# Altium PCB PicoROM IMPORTED.PcbDoc
Units mm, origin at the board's own origin, x right, y up, seen from the top; angles counter-clockwise.
Board outline 42.2 x 17.8 mm, 6 copper layers (F.Cu, In1.Cu, In2.Cu, In3.Cu, In4.Cu, B.Cu); 56 components, 106 nets, 388 pads, 131 vias.
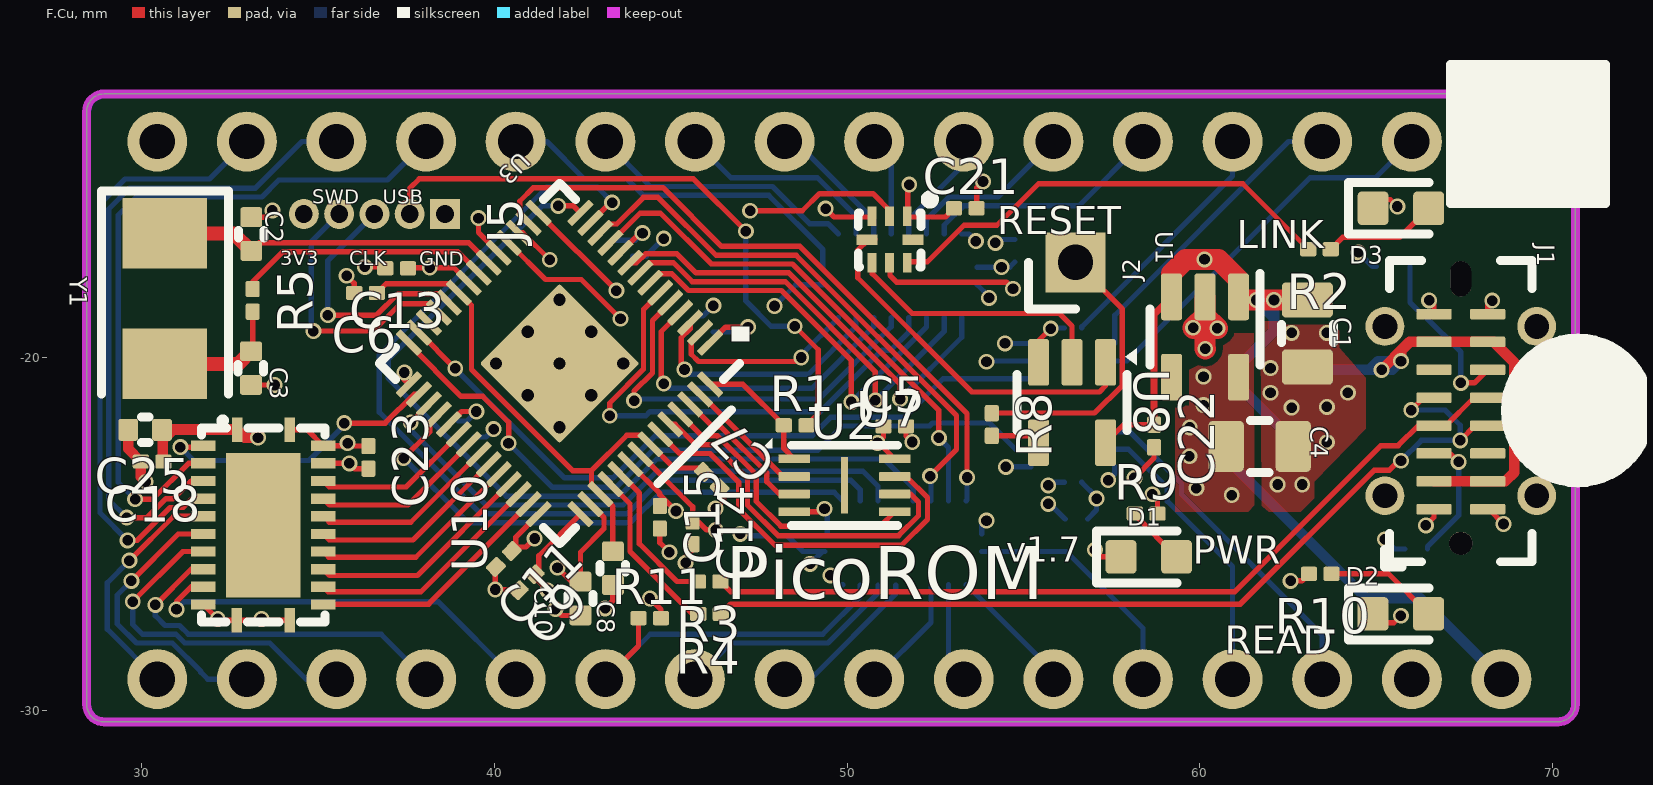
[diagram p0: F.Cu view]
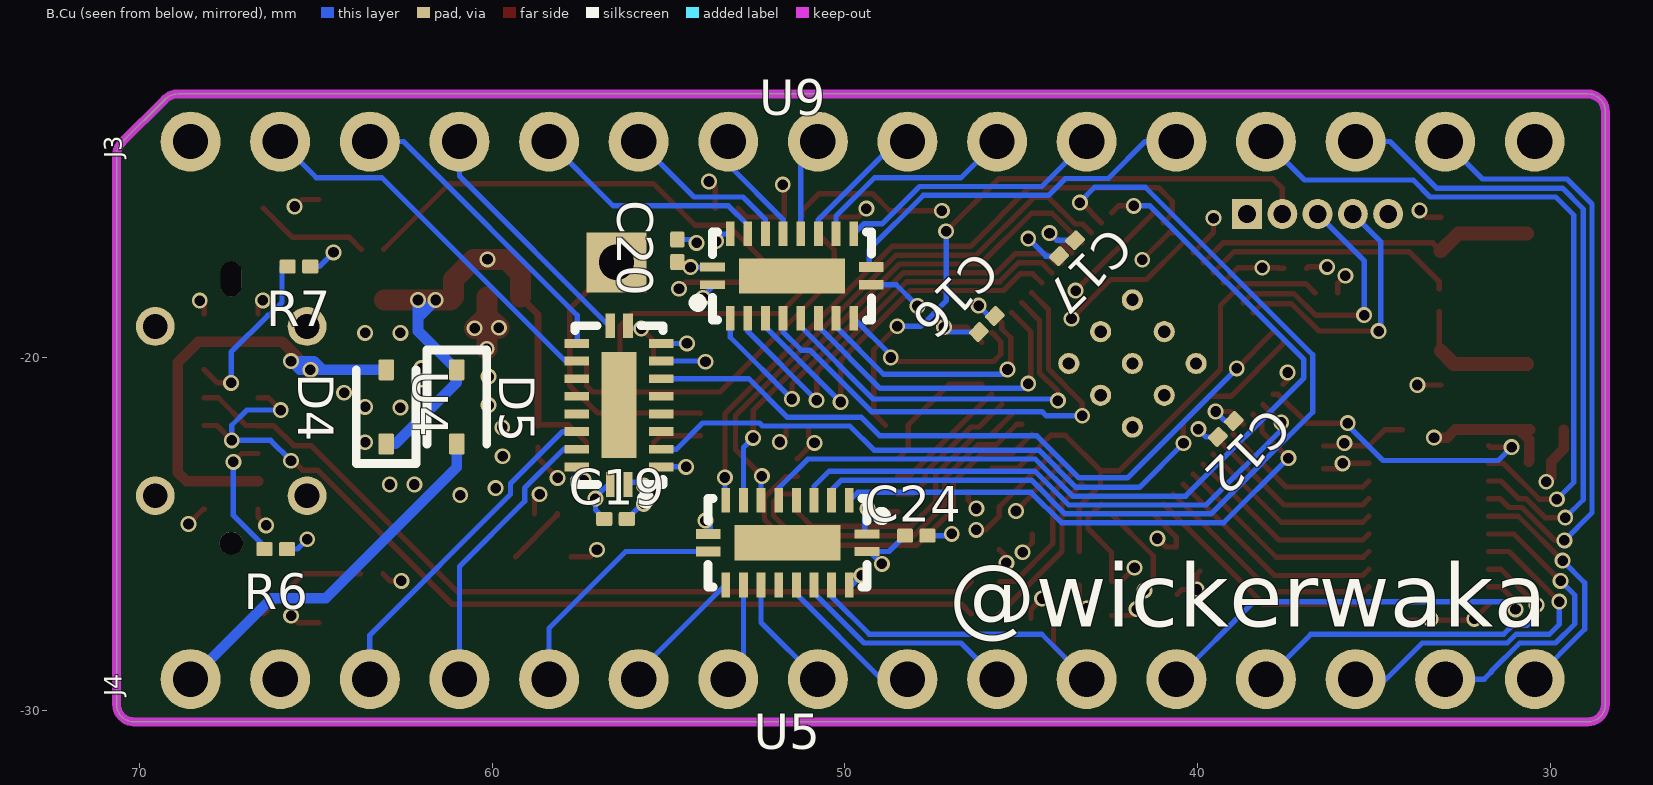
[diagram p1: B.Cu view, seen from below]
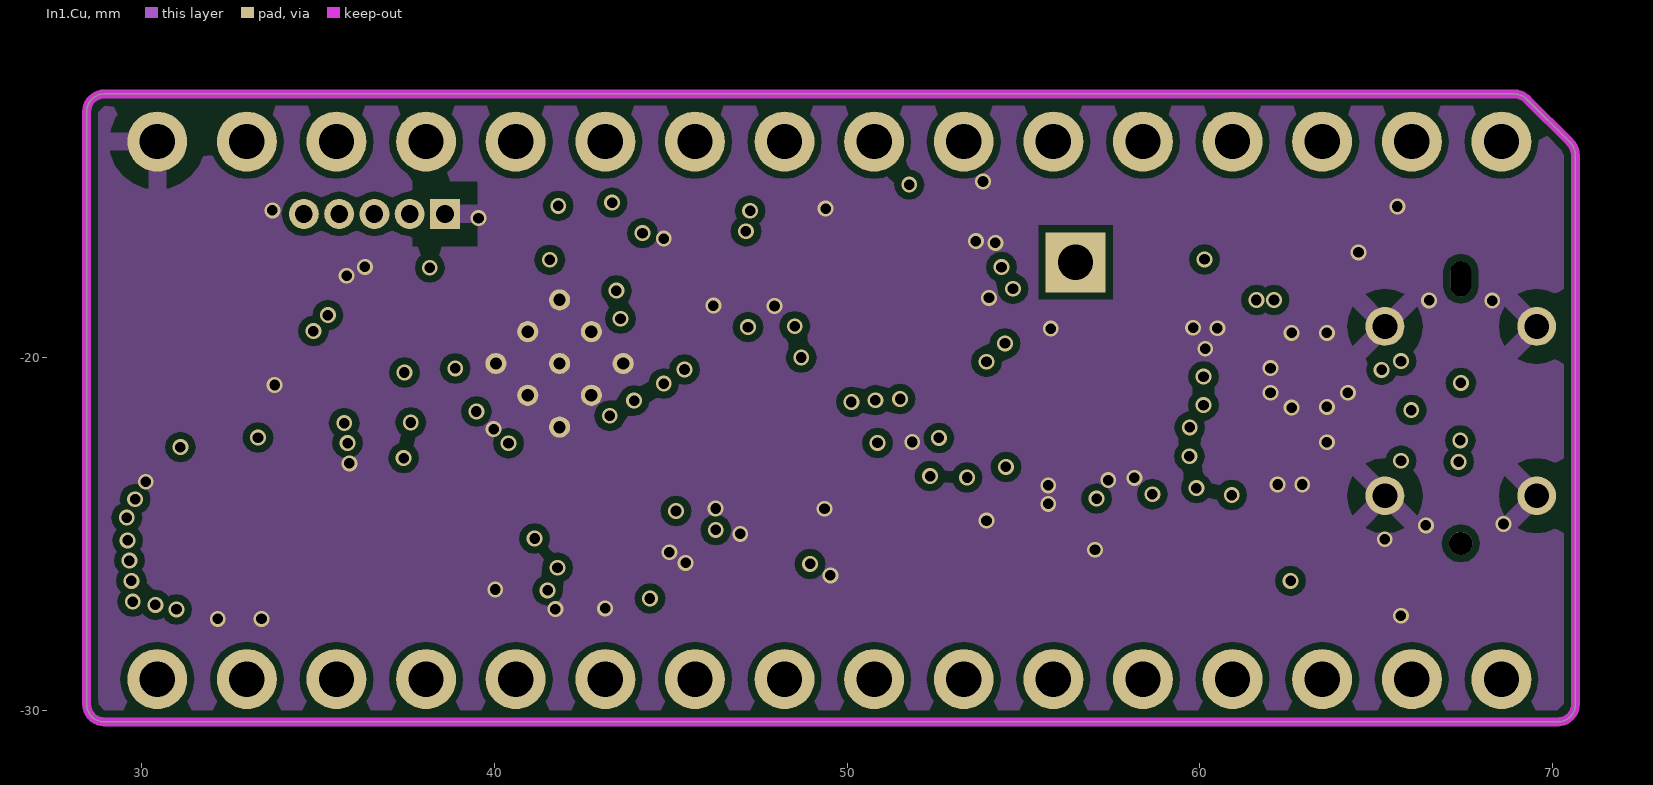
[diagram p2: In1.Cu]
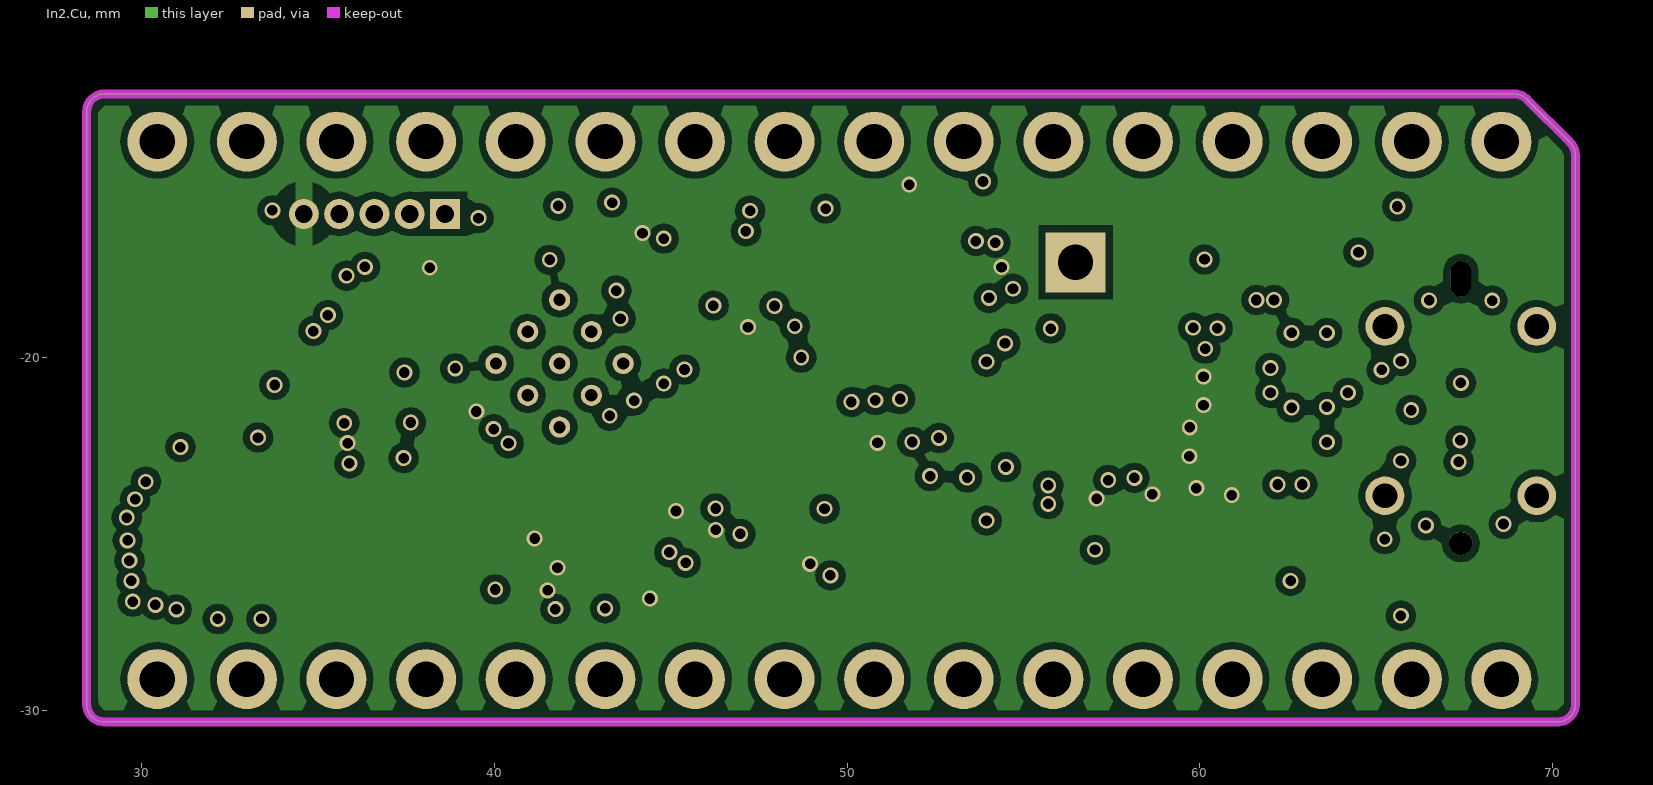
[diagram p3: In2.Cu]
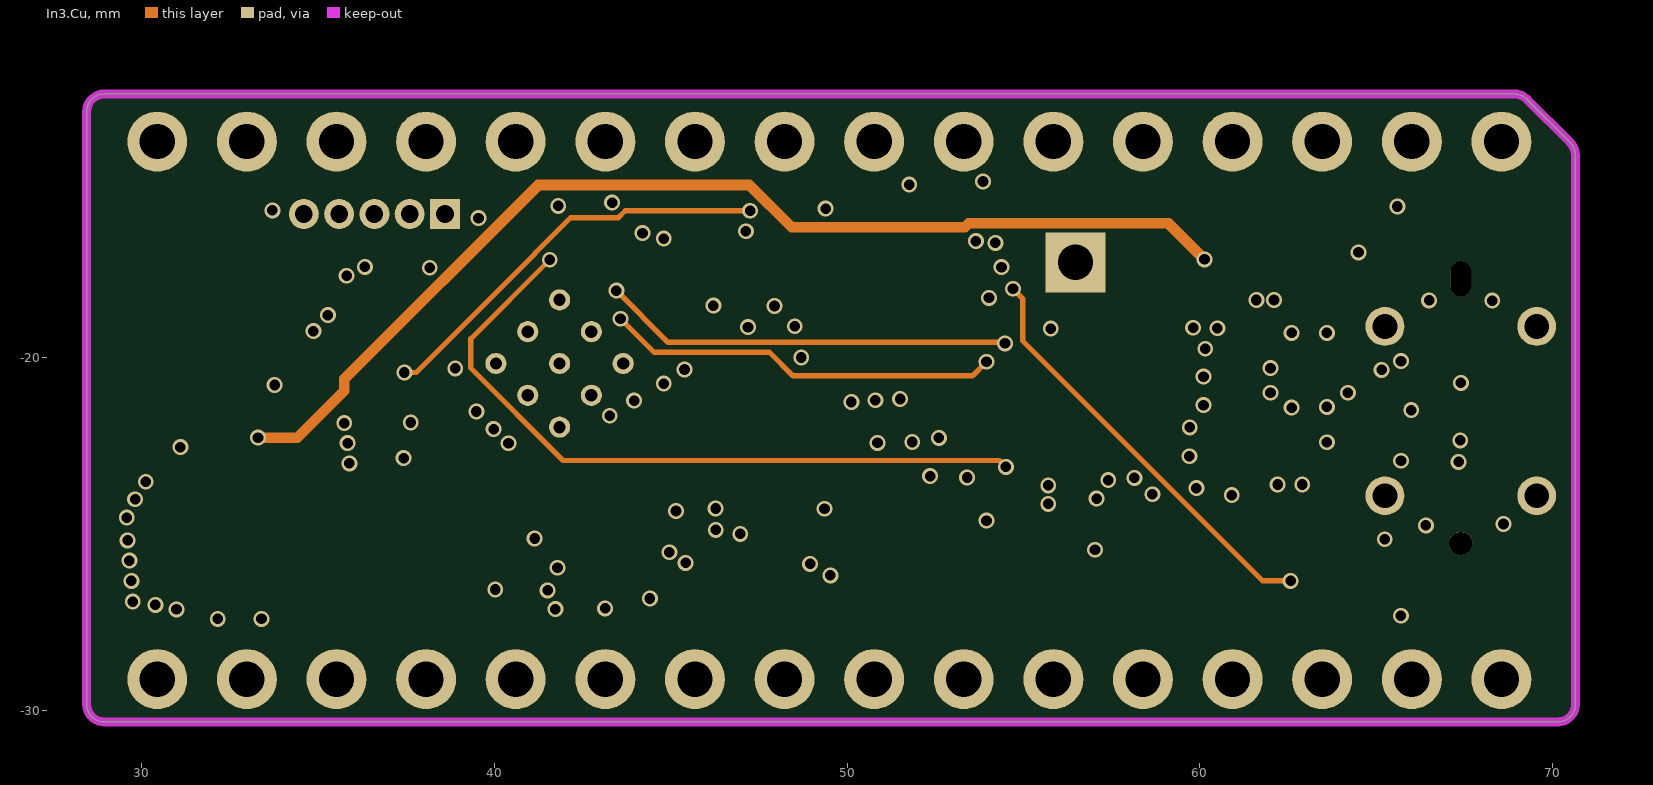
[diagram p4: In3.Cu]
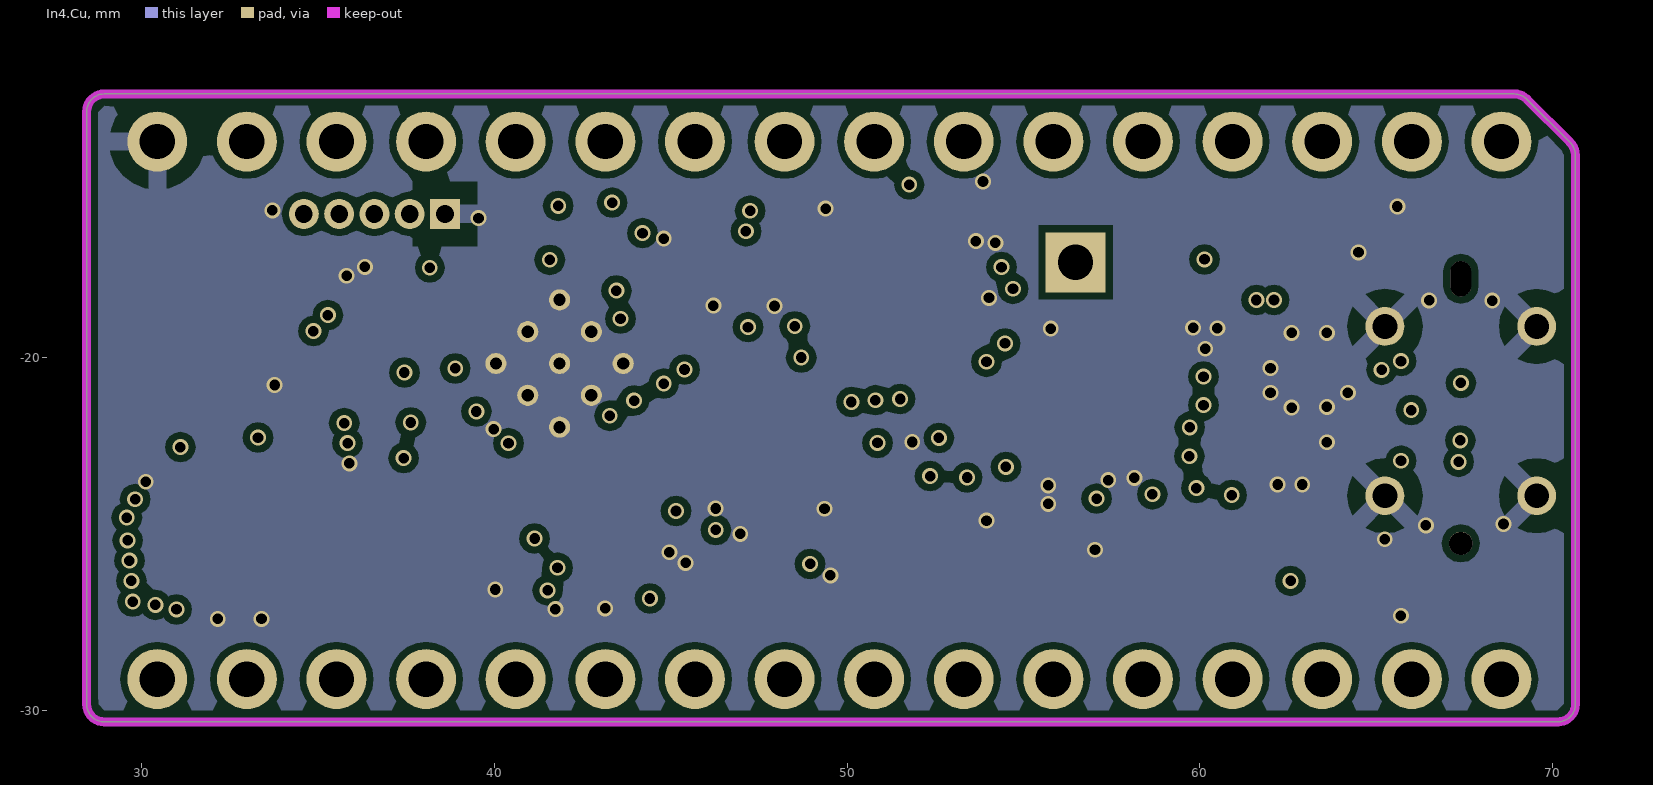
[diagram p5: In4.Cu]

## Layer stack, top to bottom
F.Mask: solder mask 0.0102, Solder Resist, Dk 3.5
F.Cu: signal copper 0.0356
Dielectric 1: dielectric 0.32, FR-4, Dk 4.8
In1.Cu: signal copper 0.0356
Dielectric2: dielectric 0.32, FR-4, Dk 4.8
In2.Cu: signal copper 0.0356
Dielectric3: dielectric 0.32, FR-4, Dk 4.8
In3.Cu: signal copper 0.0356
Dielectric4: dielectric 0.32, FR-4, Dk 4.8
In4.Cu: signal copper 0.0356
Dielectric5: dielectric 0.32, FR-4, Dk 4.8
B.Cu: signal copper 0.0356
B.Mask: solder mask 0.0102, Solder Resist, Dk 3.5

## Board outline
28.945,-12.529 68.913,-12.53 cw(c68.913,-13.03) 69.266,-12.676 70.494,-13.904 cw(c70.14,-14.257) 70.645,-29.829 cw(c70.145,-29.829) 70.145,-30.329 28.945,-30.329 cw(c28.945,-29.829) 28.445,-29.829 28.445,-13.029 cw(c28.945,-13.029) 28.945,-12.529

## Design rules (kind name [scope] priority, off if disabled: settings)
Clearance "Clearence 0.2_Polygon" [InNamedPolygon('F.Cu-GND') OR InNamedPolygon('F.Cu-+3V3') OR InNamedPolygon('In1.Cu-GND') OR InNamedPolygon('In4.Cu-GND') OR InNamedPolygon('In2.Cu-+3V3')] p1: gap=0.2 ignorepadtopadclearanceinfootprint=FALSE
MinimumSolderMaskSliver [All] p1: minsoldermaskwidth=0
PolygonConnect Polygon_In2.Cu-+3V3_ConnectDirect [IsNamedPolygon('In2.Cu-+3V3') vs IsVia] p1: connectstyle=Direct reliefconductorwidth=0.254 reliefentries=4 polygonreliefangle="90 Angle" airgapwidth=0.254
PolygonConnect Polygon_In2.Cu-+3V3_ConnectRelief45 [IsNamedPolygon('In2.Cu-+3V3') vs (IsThruPin or IsSMTPin) and (PadShape_AllLayers = 'Round')] p2: connectstyle=Relief reliefconductorwidth=0.5 reliefentries=4 polygonreliefangle="45 Angle" airgapwidth=0.5
PolygonConnect Polygon_In2.Cu-+3V3_ConnectRelief90 [IsNamedPolygon('In2.Cu-+3V3') vs (IsThruPin or IsSMTPin) and (PadShape_AllLayers <> 'Round')] p3: connectstyle=Relief reliefconductorwidth=0.5 reliefentries=4 polygonreliefangle="90 Angle" airgapwidth=0.5
PolygonConnect Polygon_In4.Cu-GND_ConnectDirect [IsNamedPolygon('In4.Cu-GND') vs IsVia] p4: connectstyle=Direct reliefconductorwidth=0.254 reliefentries=4 polygonreliefangle="90 Angle" airgapwidth=0.254
PolygonConnect Polygon_In4.Cu-GND_ConnectRelief45 [IsNamedPolygon('In4.Cu-GND') vs (IsThruPin or IsSMTPin) and (PadShape_AllLayers = 'Round')] p5: connectstyle=Relief reliefconductorwidth=0.508 reliefentries=4 polygonreliefangle="45 Angle" airgapwidth=0.508
PolygonConnect Polygon_In4.Cu-GND_ConnectRelief90 [IsNamedPolygon('In4.Cu-GND') vs (IsThruPin or IsSMTPin) and (PadShape_AllLayers <> 'Round')] p6: connectstyle=Relief reliefconductorwidth=0.508 reliefentries=4 polygonreliefangle="90 Angle" airgapwidth=0.508
PolygonConnect Polygon_In1.Cu-GND_ConnectDirect [IsNamedPolygon('In1.Cu-GND') vs IsVia] p7: connectstyle=Direct reliefconductorwidth=0.254 reliefentries=4 polygonreliefangle="90 Angle" airgapwidth=0.254
PolygonConnect Polygon_In1.Cu-GND_ConnectRelief45 [IsNamedPolygon('In1.Cu-GND') vs (IsThruPin or IsSMTPin) and (PadShape_AllLayers = 'Round')] p8: connectstyle=Relief reliefconductorwidth=0.508 reliefentries=4 polygonreliefangle="45 Angle" airgapwidth=0.508
PolygonConnect Polygon_In1.Cu-GND_ConnectRelief90 [IsNamedPolygon('In1.Cu-GND') vs (IsThruPin or IsSMTPin) and (PadShape_AllLayers <> 'Round')] p9: connectstyle=Relief reliefconductorwidth=0.508 reliefentries=4 polygonreliefangle="90 Angle" airgapwidth=0.508
PolygonConnect Polygon_F.Cu-+3V3_ConnectDirect [IsNamedPolygon('F.Cu-+3V3')] p10: connectstyle=Direct reliefconductorwidth=0.254 reliefentries=4 polygonreliefangle="90 Angle" airgapwidth=0.254
PolygonConnect Polygon_F.Cu-GND_ConnectDirect [IsNamedPolygon('F.Cu-GND')] p11: connectstyle=Direct reliefconductorwidth=0.254 reliefentries=4 polygonreliefangle="90 Angle" airgapwidth=0.254
RoutingVias [All] p1: holewidth=0.711 width=1.27 viastyle="Through Hole" minholewidth=0.711 minwidth=1.27 maxholewidth=0.711 maxwidth=1.27
SilkToSilkClearance [All] p1: silktosilkclearance=0
SilkToSolderMaskClearance [IsPad] p1: minsilkscreentomaskgap=0 clearancetoexposedcopper=TRUE
SolderMaskExpansion [All] p1: expansion=0.102 istentingtop=FALSE
Width [All] p1: maxlimit=10 minlimit=0.254 preferedwidth=0.254 midlayer1_maxwidth=0.254 midlayer4_maxwidth=0.254 minimp=50.000000 maximp=50.000000 favimp=50.000000
27 further rules are at their usual default settings.

## Components (designator, comment, footprint, x,y, rotation, side; value= is the part's Value field where it differs from the comment)
C1 "Comment" C_0805_2012Metric 63.045,-19.319 r270 top value=1u
C2 "Comment" C_0402_1005Metric 33.11,-16.5 r90 top value=27p
C3 "Comment" C_0402_1005Metric 33.1,-20.3 r270 top value=27p
C4 "Comment" C_0805_2012Metric 61.695,-22.519 r0 top value=1u
C5 "Comment" C_0201_0603Metric#1 51.35,-21.95 r0 top value=100n
C6 "Comment" C_0201_0603Metric#1 36.35,-18.17 r180 top value=100n
C7 "Comment" C_0201_0603Metric#1 46.16,-23.47 r315 top value=100n
C8 "Comment" C_0402_1005Metric 43.36,-25.97 r270 top value=1u
C9 "Comment" C_0201_0603Metric#1 40.92,-26.37 r225 top value=100n
C10 "Comment" C_0402_1005Metric 42.44,-26.83 r270 top value=1u
C11 "Comment" C_0201_0603Metric#1 40.27,-25.71 r225 top value=100n
C12 "Comment" C_0201_0603Metric#2 39.2,-22.025 r135 bottom value=100n
C13 "Comment" C_0201_0603Metric#1 37.23,-17.47 r180 top value=100n
C14 "Comment" C_0201_0603Metric#1 45.62,-24.97 r270 top value=100n
C15 "Comment" C_0201_0603Metric#1 44.69,-24.53 r270 top value=100n
C16 "Comment" C_0201_0603Metric#2 45.975,-19.05 r315 bottom value=100n
C17 "Comment" C_0201_0603Metric#2 43.7,-16.9 r135 bottom value=100n
C18 "Comment" C_0201_0603Metric#1 30.3,-22.95 r180 top value=100n
C19 "Comment" C_0201_0603Metric#2 56.5,-24.575 r0 bottom value=100n
C20 "Comment" C_0201_0603Metric#2 54.75,-16.975 r270 bottom value=100n
C21 "Comment" C_0201_0603Metric#1 53.35,-15.77 r0 top value=100n
C22 "Comment" C_0201_0603Metric#1 58.7,-22.225 r270 top value=100n
C23 "Comment" C_0201_0603Metric#1 36.43,-22.83 r270 top value=100n
C24 "Comment" C_0201_0603Metric#2 47.975,-25.05 r0 bottom value=100n
C25 "Comment" C_0402_1005Metric 30.1,-22.05 r180 top value=1u
D1 "Comment" LED_0603_1608Metric 58.55,-25.65 r0 top value=LED
D2 "Comment" LED_0603_1608Metric 65.695,-27.269 r0 top value=LED
D3 "Comment" LED_0603_1608Metric 65.695,-15.769 r0 top value=LED
D4 "Comment" D_SOD-323 63,-21.4 r270 bottom value=NSR0320MW2T1G
D5 "Comment" D_SOD-323 61,-21.4 r90 bottom value=NSR0320MW2T1G
J1 "Comment" USB_C_Receptacle_G-Switch_GT-USB-7051x 67.395,-21.519 r90 top value=USB_C_Receptacle_USB2.0
J2 "Comment" PinHeader_1x01_P2.54mm_Vertical 56.475,-17.3 r90 top value="External Reset"
J3 "Comment" PinHeader_1x16_P2.54mm_Vertical 68.545,-13.879 r270 bottom value=Conn_01x16
J4 "Comment" PinHeader_1x16_P2.54mm_Vertical 68.545,-29.119 r270 bottom value=Conn_01x16
J5 "Comment" PinHeader_1x05_P1.00mm_Vertical 38.6,-15.93 r270 top value=Conn_01x05_Pin
R1 "Comment" R_0201_0603Metric#1 48.525,-21.921 r0 top value=1k
R2 "Comment" R_0201_0603Metric#1 63.39,-16.93 r180 top value=1k
R3 "Comment" R_0201_0603Metric#1 46.09,-26.35 r180 top value=27
R4 "Comment" R_0201_0603Metric#1 46.1,-27.27 r180 top value=27
R5 "Comment" R_0201_0603Metric#1 33.15,-18.38 r270 top value=1k
R6 "Comment" R_0201_0603Metric#2 66.13,-25.43 r180 bottom value=5.1k
R7 "Comment" R_0201_0603Metric#2 65.475,-17.419 r180 bottom value=5.1k
R8 "Comment" R_0201_0603Metric#1 54.1,-21.9 r270 top value=1k
R9 "Comment" R_0201_0603Metric#1 58.475,-24.425 r0 top value=1k
R10 "Comment" R_0201_0603Metric#1 63.41,-26.13 r180 top value=1k
R11 "Comment" R_0201_0603Metric#1 44.405,-27.39 r0 top value=100k
U1 "Comment" SOT-23-5 60.145,-19.419 r270 top value=AP2112K-3.3
U2 "Comment" Winbond_USON-8-1EP_3x2mm_P0.5mm_EP0.2x1.6mm 49.925,-23.621 r0 top value=W25Q16JVUXIQ
U3 "Comment" RP2040-QFN-56 41.848,-20.169 r225 top value=RP2040
U4 "Comment" V-QFN4525-20_L4.5-W2.5-P0.50-BL 56.4,-21.35 r270 bottom value=74LVCH245
U5 "Comment" V-QFN4525-20_L4.5-W2.5-P0.50-BL 51.625,-25.25 r180 bottom value=74LVCH245
U7 "Comment" X2QFN-8_L1.5-W1.5-P0.50-BL 51.215,-16.65 r180 top value=TCA5405RUGR
U8 "Comment" SOT-23-5 56.375,-21.275 r270 top value=74AHCT1G126
U9 "Comment" V-QFN4525-20_L4.5-W2.5-P0.50-BL 51.5,-17.688 r0 bottom value=74LVCH245
U10 "Comment" DHVQFN24_L5.5-W3.5-P0.50-BL-EP 33.45,-24.75 r270 top value=74LVCH8T245
Y1 "Comment" Crystal_SMD_5032-2Pin_5.0x3.2mm 30.66,-18.33 r270 top value=445C25D12M00000

## Footprints (in the part's own frame and the unit in brackets; to place one, negate y for a bottom-side part, rotate by r counter-clockwise, add the part's x,y. Pads: shape width x height; smd on the part's side, far side on the other; paste and mask are expansions set on the pad)
C_0201_0603Metric#1 [mm]
  rrect25% 0.46x0.4 smd paste-0.46 mask+0.051: 1(-0.32,0) 2(0.32,0)
  rrect25% 0.318x0.36 on Top Paste mask-0.36: Un1(-0.345,0) Un2(0.345,0)
C_0201_0603Metric#2 [mm]
  rrect25% 0.46x0.4 smd paste-0.46 mask+0.051: 1(0.32,0) 2(-0.32,0)
  rrect25% 0.318x0.36 on Bottom Paste mask-0.36: Un1(0.345,0) Un2(-0.345,0)
C_0402_1005Metric [mm]
  rrect25% 0.56x0.62 smd mask+0.051: 1(-0.48,0) 2(0.48,0)
  silkscreen extent -0.11,-0.36 0.11,0.36
C_0805_2012Metric [mm]
  rrect25% 1x1.45 smd mask+0.051: 1(-0.95,0) 2(0.95,0)
  silkscreen extent -0.26,-0.73 0.26,0.73
Crystal_SMD_5032-2Pin_5.0x3.2mm [mm]
  rect 2x2.4 smd mask+0.051: 1(-1.85,0) 2(1.85,0)
  silkscreen extent -3.05,-1.8 2.7,1.8
D_SOD-323 [mm]
  rrect25% 0.6x0.45 smd mask+0.051: 1(1.05,0) 2(-1.05,0)
  silkscreen extent -1.05,-0.85 1.61,0.85
DHVQFN24_L5.5-W3.5-P0.50-BL-EP [mm]
  rect 0.7x0.29 smd mask+0.051: 1(-2.7,-0.74) 12(2.7,-0.75) 13(2.7,0.75) 24(-2.7,0.75)
  rect 0.29x0.7 smd mask+0.051: 2(-2.25,-1.7) 3(-1.75,-1.7) 4(-1.25,-1.7) 5(-0.75,-1.7) 6(-0.25,-1.7) 7(0.25,-1.7) 8(0.75,-1.7) 9(1.25,-1.7) 10(1.75,-1.7) 11(2.25,-1.7) 14(2.25,1.7) 15(1.75,1.7) 16(1.25,1.7) 17(0.75,1.7) 18(0.25,1.7) 19(-0.25,1.7) 20(-0.75,1.7) 21(-1.25,1.7) 22(-1.75,1.7) 23(-2.25,1.7)
  rect 4.1x2.1 smd mask+0.051: 25(0,0)
  silkscreen extent -3.01,-1.75 2.75,1.75
LED_0603_1608Metric [mm]
  rrect25% 0.875x0.95 smd mask+0.051: 1(-0.787,0) 2(0.787,0)
  silkscreen extent -1.49,-0.73 0.8,0.73
PinHeader_1x01_P2.54mm_Vertical [mm]
  rect 1.7x1.7 hole 1 paste-2539.97 mask+0.051: 1(0,0)
  silkscreen extent -1.33,0 0,1.33
PinHeader_1x05_P1.00mm_Vertical [mm]
  rect 0.85x0.85 hole 0.5 paste-2539.97 mask+0.051: 1(0,0)
  rrect100% 0.85x0.85 hole 0.5 paste-2539.97 mask+0.051: 2(0,-1) 3(0,-2) 4(0,-3) 5(0,-4)
PinHeader_1x16_P2.54mm_Vertical [mm]
  round 1.7 hole 1 paste-2539.97 mask+0.051: 1(0,0)
  rrect100% 1.7x1.7 hole 1 paste-2539.97 mask+0.051: 2(0,2.54) 3(0,5.08) 4(0,7.62) 5(0,10.16) 6(0,12.7) 7(0,15.24) 8(0,17.78) 9(0,20.32) 10(0,22.86) 11(0,25.4) 12(0,27.94) 13(0,30.48) 14(0,33.02) 15(0,35.56) 16(0,38.1)
R_0201_0603Metric#1 [mm]
  rrect25% 0.46x0.4 smd paste-0.46 mask+0.051: 1(-0.32,0) 2(0.32,0)
  rrect25% 0.318x0.36 on Top Paste mask-0.36: Un1(-0.345,0) Un2(0.345,0)
R_0201_0603Metric#2 [mm]
  rrect25% 0.46x0.4 smd paste-0.46 mask+0.051: 1(0.32,0) 2(-0.32,0)
  rrect25% 0.318x0.36 on Bottom Paste mask-0.36: Un1(0.345,0) Un2(-0.345,0)
RP2040-QFN-56 [mm]
  rrect25% 0.875x0.2 smd mask+0.051: 1(-3.437,2.6) 2(-3.437,2.2) 3(-3.437,1.8) 4(-3.437,1.4) 5(-3.437,1) 6(-3.438,0.6) 7(-3.438,0.2) 8(-3.438,-0.2) 9(-3.438,-0.6) 10(-3.437,-1) 11(-3.437,-1.4) 12(-3.437,-1.8) 13(-3.437,-2.2) 14(-3.437,-2.6) 29(3.437,-2.6) 30(3.437,-2.2) 31(3.437,-1.8) 32(3.437,-1.4) 33(3.437,-1) 34(3.438,-0.6) 35(3.438,-0.2) 36(3.438,0.2) 37(3.438,0.6) 38(3.437,1) 39(3.437,1.4) 40(3.437,1.8) 41(3.437,2.2) 42(3.437,2.6)
  rrect25% 0.2x0.875 smd mask+0.051: 15(-2.6,-3.437) 16(-2.2,-3.437) 17(-1.8,-3.437) 18(-1.4,-3.437) 19(-1,-3.437) 20(-0.6,-3.438) 21(-0.2,-3.438) 22(0.2,-3.438) 23(0.6,-3.438) 24(1,-3.437) 25(1.4,-3.437) 26(1.8,-3.437) 27(2.2,-3.437) 28(2.6,-3.437) 43(2.6,3.437) 44(2.2,3.437) 45(1.8,3.437) 46(1.4,3.437) 47(1,3.437) 48(0.6,3.438) 49(0.2,3.438) 50(-0.2,3.438) 51(-0.6,3.438) 52(-1,3.437) 53(-1.4,3.437) 54(-1.8,3.437) 55(-2.2,3.437) 56(-2.6,3.437)
  round 0.6 hole 0.35 paste-2539.97 mask-0.6: 57(-1.275,0) 57(-1.275,-1.275) 57(-1.275,1.275) 57(0,-1.275) 57(0,1.275) 57(0,0) 57(1.275,1.275) 57(1.275,-1.275) 57(1.275,0)
  rrect4% 3.2x3.2 smd mask+0.051: 57(0,0)
  rrect23% 1.084x1.084 on Top Paste mask-1.084: Un1(-0.637,0.637) Un2(-0.637,-0.637) Un3(0.637,0.637) Un4(0.637,-0.637)
  silkscreen extent -3.61,-3.61 3.61,3.61
SOT-23-5 [mm]
  rrect25% 1.325x0.6 smd mask+0.051: 1(-1.138,0.95) 2(-1.138,0) 3(-1.138,-0.95) 4(1.138,-0.95) 5(1.138,0.95)
  silkscreen extent -1.8,-1.56 0.8,1.56
USB_C_Receptacle_G-Switch_GT-USB-7051x [mm]
  rrect25% 0.3x1 smd mask+0.051: A1(-2.78,0.76) A4(-1.99,0.76) A5(-1.2,0.76) A6(-0.41,0.76) A7(0.38,0.76) A8(1.17,0.76) A9(1.96,0.76) A12(2.75,0.76) B1(2.75,-0.76) B4(1.96,-0.76) B5(1.17,-0.76) B6(0.38,-0.76) B7(-0.41,-0.76) B8(-1.2,-0.76) B9(-1.99,-0.76) B12(-2.78,-0.76)
  round 1.1 hole 0.7 mask+0.051: S1(-2.4,-2.15) S1(-2.4,2.15) S1(2.4,-2.15) S1(2.4,2.15)
  round 0.66 hole 0.66 paste-2539.97 mask+0.051: Un1(-3.75,0)
  rrect100% 1x0.58 hole 0.58 slot 1 at 0 deg paste-2539.97 mask+0.051: Un2(3.75,0)
  silkscreen extent -4.42,-2.02 4.27,2.17
V-QFN4525-20_L4.5-W2.5-P0.50-BL [mm]
  rect 0.7x0.25 smd mask+0.051: 1(2.25,0.25) 20(2.25,-0.25)
  rect 0.25x0.7 smd mask+0.051: 2(1.75,1.2) 3(1.25,1.2) 4(0.75,1.2) 5(0.25,1.2) 6(-0.25,1.2) 7(-0.75,1.2) 8(-1.25,1.2) 9(-1.75,1.2) 12(-1.75,-1.2) 13(-1.25,-1.2) 14(-0.75,-1.2) 15(-0.25,-1.2) 16(0.25,-1.2) 17(0.75,-1.2) 18(1.25,-1.2) 19(1.75,-1.2)
  rect 0.7x0.28 smd mask+0.051: 10(-2.25,0.25) 11(-2.25,-0.25)
  rect 3x1 smd mask+0.051: 21(0,0)
  silkscreen extent -2.25,-1.25 2.8,1.25
Winbond_USON-8-1EP_3x2mm_P0.5mm_EP0.2x1.6mm [mm]
  rrect25% 0.9x0.25 smd mask+0.051: 1(-1.425,0.75) 2(-1.425,0.25) 3(-1.425,-0.25) 4(-1.425,-0.75) 5(1.425,-0.75) 6(1.425,-0.25) 7(1.425,0.25) 8(1.425,0.75)
  rect 0.2x1.6 smd paste-1.6 mask+0.051: 9(0,0)
  rrect25% 0.16x1.29 on Top Paste mask-1.29: Un1(0,0)
  silkscreen extent -2.33,-1.13 1.5,1.33
X2QFN-8_L1.5-W1.5-P0.50-BL [mm]
  rect 0.25x0.55 smd mask+0.051: 1(-0.49,-0.66) 2(0.01,-0.66) 3(0.51,-0.66) 5(0.51,0.66) 6(0.01,0.66) 7(-0.49,0.66)
  rect 0.6x0.3 smd mask+0.051: 4(0.65,0.01) 8(-0.65,0.01)
  silkscreen extent -1.26,-1.26 0.9,0.78

## Part data
C1 C4: library part C_0805_2012Metric, "Capacitor SMD 0805 (2012 Metric), square (rectangular) end terminal, IPC_7351 nominal, (Body size source: IPC-SM-782 page 76, https://www.pcb-3d.com/wordpress/wp-content/uploads/ipc-sm-782a_amendment_1_and_2.pdf, https://docs.google.com/spreadsheets/d/1BsfQQcO9C6DZCsRaXUlFlo91Tg2WpOkGARC1WS5S8t0/edit?usp=sharing), generated with kicad-footprint-generator", MPN=C28323, Footprint=Capacitor_SMD:C_0805_2012Metric, ki_fp_filters=C_*
C2 C3: library part C_0402_1005Metric, "Capacitor SMD 0402 (1005 Metric), square (rectangular) end terminal, IPC_7351 nominal, (Body size source: IPC-SM-782 page 76, https://www.pcb-3d.com/wordpress/wp-content/uploads/ipc-sm-782a_amendment_1_and_2.pdf), generated with kicad-footprint-generator", MPN=C1557, Footprint=Capacitor_SMD:C_0402_1005Metric, ki_fp_filters=C_*
C5 C6 C7 C9 C11 C12 C13 C14 C15 C16 C17 C18 C19 C20 C21 C22 C23 C24: library part C_0201_0603Metric, "Capacitor SMD 0201 (0603 Metric), square (rectangular) end terminal, IPC_7351 nominal, (Body size source: https://www.vishay.com/docs/20052/crcw0201e3.pdf), generated with kicad-footprint-generator", MPN=C1525, Footprint=Capacitor_SMD:C_0201_0603Metric, ki_fp_filters=C_*
C8 C10 C25: library part C_0402_1005Metric, "Capacitor SMD 0402 (1005 Metric), square (rectangular) end terminal, IPC_7351 nominal, (Body size source: IPC-SM-782 page 76, https://www.pcb-3d.com/wordpress/wp-content/uploads/ipc-sm-782a_amendment_1_and_2.pdf), generated with kicad-footprint-generator", MPN=C52923, Footprint=Capacitor_SMD:C_0402_1005Metric, ki_fp_filters=C_*
D1: library part LED_0603_1608Metric, "LED SMD 0603 (1608 Metric), square (rectangular) end terminal, IPC_7351 nominal, (Body size source: http://www.tortai-tech.com/upload/download/2011102023233369053.pdf), generated with kicad-footprint-generator", MPN=C510027, Footprint=LED_SMD:LED_0603_1608Metric, ki_fp_filters="LED* LED_SMD:* LED_THT:*"
D2: library part LED_0603_1608Metric, "LED SMD 0603 (1608 Metric), square (rectangular) end terminal, IPC_7351 nominal, (Body size source: http://www.tortai-tech.com/upload/download/2011102023233369053.pdf), generated with kicad-footprint-generator", MPN=C2922668, Footprint=LED_SMD:LED_0603_1608Metric, ki_fp_filters="LED* LED_SMD:* LED_THT:*"
D3: library part LED_0603_1608Metric, "LED SMD 0603 (1608 Metric), square (rectangular) end terminal, IPC_7351 nominal, (Body size source: http://www.tortai-tech.com/upload/download/2011102023233369053.pdf), generated with kicad-footprint-generator", MPN=C2925173, Footprint=LED_SMD:LED_0603_1608Metric, ki_fp_filters="LED* LED_SMD:* LED_THT:*"
D4 D5: library part D_SOD-323, "SOD-323", MPN=C48192, Footprint=Diode_SMD:D_SOD-323, Description="Schottky diode", ki_fp_filters="TO-???* *_Diode_* *SingleDiode* D_*"
J1: library part USB_C_Receptacle_G-Switch_GT-USB-7051x, "USB Type C, vertical, SMT, https://datasheet.lcsc.com/lcsc/2108072030_G-Switch-GT-USB-7051A_C2843970.pdf", MPN=C2843970, Footprint=Connector_USB:USB_C_Receptacle_G-Switch_GT-USB-7051x, Datasheet=https://www.usb.org/sites/default/files/documents/usb_type-c.zip, ki_fp_filters=USB*C*Receptacle*
J2: library part PinHeader_1x01_P2.54mm_Vertical, "Through hole straight pin header, 1x01, 2.54mm pitch, single row", Footprint=Connector_PinHeader_2.54mm:PinHeader_1x01_P2.54mm_Vertical, Description="Generic connector, single row, 01x01, script generated", ki_fp_filters=Connector*:*_1x??_*
J3 J4: library part PinHeader_1x16_P2.54mm_Vertical, "Through hole straight pin header, 1x16, 2.54mm pitch, single row", Footprint=Connector_PinHeader_2.54mm:PinHeader_1x16_P2.54mm_Vertical, ki_fp_filters=Connector*:*_1x??_*
J5: library part PinHeader_1x05_P1.00mm_Vertical, "Through hole straight pin header, 1x05, 1.00mm pitch, single row", Footprint=Connector_PinHeader_1.00mm:PinHeader_1x05_P1.00mm_Vertical, Description="Generic connector, single row, 01x05, script generated", ki_fp_filters=Connector*:*_1x??_*
R1 R2 R5 R8 R9 R10: library part R_0201_0603Metric, "Resistor SMD 0201 (0603 Metric), square (rectangular) end terminal, IPC_7351 nominal, (Body size source: https://www.vishay.com/docs/20052/crcw0201e3.pdf), generated with kicad-footprint-generator", MPN=C270335, Footprint=Resistor_SMD:R_0201_0603Metric, ki_fp_filters=R_*
R3 R4: library part R_0201_0603Metric, "Resistor SMD 0201 (0603 Metric), square (rectangular) end terminal, IPC_7351 nominal, (Body size source: https://www.vishay.com/docs/20052/crcw0201e3.pdf), generated with kicad-footprint-generator", MPN=C273268, Footprint=Resistor_SMD:R_0201_0603Metric, ki_fp_filters=R_*
R6 R7: library part R_0201_0603Metric, "Resistor SMD 0201 (0603 Metric), square (rectangular) end terminal, IPC_7351 nominal, (Body size source: https://www.vishay.com/docs/20052/crcw0201e3.pdf), generated with kicad-footprint-generator", MPN=C473460, Footprint=Resistor_SMD:R_0201_0603Metric, ki_fp_filters=R_*
R11: library part R_0201_0603Metric, "Resistor SMD 0201 (0603 Metric), square (rectangular) end terminal, IPC_7351 nominal, (Body size source: https://www.vishay.com/docs/20052/crcw0201e3.pdf), generated with kicad-footprint-generator", MPN=C270364, Footprint=Resistor_SMD:R_0201_0603Metric, ki_fp_filters=R_*
U1: library part SOT-23-5, "SOT, 5 Pin (https://www.jedec.org/sites/default/files/docs/Mo-178c.PDF variant AA), generated with kicad-footprint-generator ipc_gullwing_generator.py", MPN=C51118, Footprint=Package_TO_SOT_SMD:SOT-23-5, Datasheet=https://www.diodes.com/assets/Datasheets/AP2112.pdf, ki_fp_filters=SOT?23?5*
U2: library part Winbond_USON-8-1EP_3x2mm_P0.5mm_EP0.2x1.6mm, "Winbond  USON, 8 Pin (https://www.lcsc.com/datasheet/lcsc_datasheet_2205122030_Winbond-Elec-W25Q16JVUXIQ_C2843335.pdf#page=66f), generated with kicad-footprint-generator ipc_noLead_generator.py", MPN=C2843335, Footprint=Package_SON:Winbond_USON-8-1EP_3x2mm_P0.5mm_EP0.2x1.6mm, Datasheet=http://www.winbond.com/resource-files/w25q128jv_dtr%20revc%2003272018%20plus.pdf, ki_fp_filters=SOIC*5.23x5.23mm*P1.27mm*
U3: library part RP2040-QFN-56, "QFN, 56 Pin (http://www.cypress.com/file/416486/download#page=40), generated with kicad-footprint-generator ipc_dfn_qfn_generator.py", MPN=C2040, Footprint=RP2040_minimal:RP2040-QFN-56
U4 U5 U9: library part V-QFN4525-20_L4.5-W2.5-P0.50-BL, MPN=C548916, Footprint=RP2040_minimal:V-QFN4525-20_L4.5-W2.5-P0.50-BL, Datasheet=https://www.ti.com/lit/ds/symlink/sn74lvc245a.pdf, Description="Octal BUS Transceivers, 3-State outputs", ki_fp_filters=DIP?20*
U7: library part X2QFN-8_L1.5-W1.5-P0.50-BL, MPN=C2674123, Footprint=RP2040_minimal:X2QFN-8_L1.5-W1.5-P0.50-BL, Datasheet=TCA5405RUGR, ki_fp_filters=RUG8
U8: library part SOT-23-5, "SOT, 5 Pin (https://www.jedec.org/sites/default/files/docs/Mo-178c.PDF variant AA), generated with kicad-footprint-generator ipc_gullwing_generator.py", MPN=C163712, Footprint=Package_TO_SOT_SMD:SOT-23-5, Datasheet=http://www.ti.com/lit/sg/scyt129e/scyt129e.pdf, Description="Single Buffer Gate Tri-State, Low-Voltage CMOS", ki_fp_filters="SOT* SG-*"
U10: library part DHVQFN24_L5.5-W3.5-P0.50-BL-EP, MPN=C458263, Footprint=RP2040_minimal:DHVQFN24_L5.5-W3.5-P0.50-BL-EP, Datasheet=https://www.ti.com/lit/ds/symlink/sn74avc8t245.pdf, Description="8-Bit Dual-Supply Bus Transceiver With Configurable Voltage Translation and 3-State Outputs, TSSOP-24", ki_fp_filters=TSSOP*4.4x7.8mm*P0.65mm*
Y1: library part Crystal_SMD_5032-2Pin_5.0x3.2mm, "SMD Crystal SERIES SMD2520/2 http://www.icbase.com/File/PDF/HKC/HKC00061008.pdf, 5.0x3.2mm^2 package", MPN=C148313, Footprint=Crystal:Crystal_SMD_5032-2Pin_5.0x3.2mm, ki_fp_filters=Crystal*

## Via types
v1: diameter 0.45, hole 0.3, F.Cu to B.Cu, tented both sides, 131 vias

## Nets (pads, with @x,y where several pads share a name; then routed paths per layer and width w, separated by ;. In a path a pad name is that pad's centre, name@x,y a point inside that pad or via, vN(x,y) a via of type N, cw(c..) or ccw(c..) an arc to the next point about the centre after c; other vN are vias at no path point)
+1V1: C6.1 C7.1 C8.1 U3.23 U3.45 U3.50 | length 15.9
  F.Cu w0.15: C6.1 36.93,-17.91 38.741,-17.91 U3.23 39.35,-18.519 39.35,-20.34 42.217,-23.207 42.754,-23.207 ; C8.1 43.36,-24.226 U3.45 42.754,-23.62 42.754,-23.207 ; C7.1@45.821,-23.131 45.093,-23.131 U3.50 44.168,-22.206 43.754,-22.206 42.754,-23.207
+3V3: C4.1 C5.1 C9.1 C10.1 C11.1 C12.1 C13.1 C14.1 C15.1 C16.1 C17.1 C19.1 C20.1 C21.1 C23.1 C24.1 J5.5 R9.2 R11.2 U1.5 U2.8 U3.1 U3.10 U3.22 U3.33 U3.42 U3.43 U3.44 U3.48 U3.49 U4.20 U5.20 U7.1 U9.20 U10.23 U10.24 | length 32.1
  F.Cu w0.15: U10.24 34.7,-22.05 U10.23 35.767,-22.5 v1(35.84,-22.427) 35.923,-22.51 C23.1 ; C13.1 37.684,-17.47 37.7,-17.454 38.85,-17.454 U3.22 ; U3.33 39.073,-21.53 v1(39.49,-21.53) ; v1(41.14,-25.13) 40.899,-25.371 40.609,-25.371 40.609,-25.085 U3.42 ; v1(41.51,-26.6) 41.259,-26.35 41.259,-26.031 41.259,-25.619 U3.43 ; v1(41.79,-25.96) 42.18,-26.35 C10.1 42.44,-25.52 43.11,-24.85 43.11,-24.54 42.725,-24.155 U3.44 ; U3.10 44.128,-16.475 v1(44.2,-16.475) ; U3.48 44.69,-23.859 44.69,-23.89 v1(45.15,-24.35) ; U3.49 44.137,-22.747 45.62,-24.23 45.62,-24.49 46.016,-24.886 v1(46.277,-24.886) ; v1(44.41,-26.83) 44.725,-27.145 R11.2 ; U3.1 46.554,-19.14 v1(47.19,-19.14) ; C5.1 51.03,-22.25 v1(50.86,-22.42) 50.899,-22.42 U2.8 ; v1(51.76,-15.1) 51.715,-15.145 51.715,-16.015 52.785,-16.015 C21.1 ; v1(58.65,-23.875) 58.795,-24.02 R9.2
  B.Cu w0.15: C12.1 39.221,-21.799 v1(39.49,-21.53) ; C17.1 44.001,-16.674 v1(44.2,-16.475) ; C16.1 47.054,-19.276 v1(47.19,-19.14) ; C24.1 48.745,-25.5 U5.20 49.3,-25.5 v1(48.95,-25.85) ; U9.20@53.687,-17.437 54.608,-17.437 C20.1 ; U4.20@56.65,-23.537 57.07,-23.958 v1(57.07,-24) 57.07,-24.325 C19.1
  other v1: 60.9,-23.9 59.9,-23.7 59.7,-22.8 59.71,-21.98 60.1,-21.35 60.1,-20.54 38.17,-17.454 54.375,-17.437
+5V: C1.1 C18.1 C22.1 C25.1 D4.1 D5.1 U1.1 U1.3 U8.5 U10.1 | length 52.2
  F.Cu w0.15: C25.1 C25.1@30.62,-22.09 ; U8.5 57.833,-21.905 C22.1 ; C1.1 C1.1@63.076,-18.4
  F.Cu w0.2: C22.1 58.695,-21.9 58.695,-18.781 U1.3
  F.Cu w0.3: C25.1 30.59,-22.04 31.14,-22.04 ; C18.1 30.6,-22.93 30.6,-22.333 30.893,-22.04 31.14,-22.04 ; v1(33.3,-22.27) 32.93,-22.27 U10.1 32.7,-22.04 31.14,-22.04
  F.Cu w0.6: U1.3 59.195,-17.619 59.595,-17.219 60.527,-17.219 61.095,-17.787 U1.1 61.182,-18.369 v1(61.6,-18.369) C1.1
  In3.Cu w0.3: v1(33.3,-22.27) 34.417,-22.27 35.75,-20.937 35.75,-20.61 41.25,-15.11 47.227,-15.11 48.427,-16.31 53.333,-16.31 53.443,-16.2 59.11,-16.2 v1(60.13,-17.22)
  B.Cu w0.3: v1(61.6,-18.369) 62.1,-18.869 ; v1(62.1,-18.369) 62.1,-18.869 ; D4.1 62.743,-22.45 61,-20.707 D5.1 62.1,-19.25 62.1,-18.869
A0: U3.2 U9.9 | length 5.5
  F.Cu w0.15: U3.2 45.582,-19.546 45.582,-19.908 45.786,-20.112 48.588,-20.112 v1(48.7,-20)
  B.Cu w0.15: v1(48.7,-20) 48.7,-19.925 U9.9@49.75,-18.875
A1: U3.3 U9.8 | length 7.2
  F.Cu w0.15: v1(45.39,-20.34) 45.299,-20.249 45.299,-19.44 45.552,-19.188 U3.3
  B.Cu w0.15: v1(45.39,-20.34) 45.525,-20.475 48.9,-20.475 50.25,-19.125 U9.8@50.25,-18.875
A2: U3.4 U9.7 | length 9.2
  F.Cu w0.15: v1(44.8,-20.74) 44.73,-20.67 44.73,-19.267 U3.4
  B.Cu w0.15: v1(44.8,-20.74) 44.935,-20.875 49,-20.875 50.75,-19.125 U9.7@50.75,-18.875
A3: U3.5 U9.6 | length 11.6
  F.Cu w0.15: v1(43.96,-21.22) 43.96,-20.954 44.48,-20.434 44.48,-18.951 U3.5
  B.Cu w0.15: v1(43.96,-21.22) 44.004,-21.176 49.199,-21.176 51.25,-19.125 U9.6@51.25,-18.875
A4: U3.6 U9.5 | length 13.9
  F.Cu w0.15: v1(43.27,-21.65) 43.27,-21.29 44.23,-20.33 44.23,-18.636 U3.6
  B.Cu w0.15: v1(43.27,-21.65) 44.298,-21.65 44.414,-21.534 49.245,-21.534 50.989,-19.79 51.236,-19.79 51.75,-19.276 U9.5@51.75,-18.875
A5: U3.7 U9.4 | length 11.3
  F.Cu w0.15: U3.7 44.673,-17.627 45.034,-17.627 45.507,-18.1 48.141,-18.1 50.12,-20.079 v1(50.12,-21.26)
  B.Cu w0.15: v1(50.12,-21.26) 52.25,-19.13 U9.4@52.25,-18.875
A6: U3.8 U9.3 | length 12
  F.Cu w0.15: U3.8 44.423,-17.312 45.072,-17.312 45.61,-17.85 48.244,-17.85 50.8,-20.406 v1(50.8,-21.21)
  B.Cu w0.15: v1(50.8,-21.21) 52.75,-19.26 U9.3@52.75,-18.875
A7: U3.9 U9.2 | length 12.7
  F.Cu w0.15: U3.9 44.031,-17.314 44.284,-17.062 45.175,-17.062 45.714,-17.6 48.348,-17.6 51.5,-20.752 v1(51.5,-21.175)
  B.Cu w0.15: v1(51.5,-21.175) 53.25,-19.425 U9.2@53.25,-18.875
A8: U3.11 U5.8 | length 14.7
  F.Cu w0.15: U3.11 44.127,-15.91 44.71,-15.91 46.15,-17.35 48.451,-17.35 52.6,-21.499 v1(52.6,-22.28)
  B.Cu w0.15: v1(52.6,-22.28) 52.875,-22.555 U5.8@52.875,-24.062
A9: U3.12 U5.7 | length 15.8
  F.Cu w0.15: U3.12 43.259,-16.213 43.471,-16.213 44.224,-15.46 44.64,-15.46 46.28,-17.1 48.555,-17.1 53.1,-21.645 53.1,-22.61 v1(52.35,-23.36)
  B.Cu w0.15: v1(52.35,-23.36) 52.375,-23.385 U5.7@52.375,-24.062
A10: U3.13 U5.3 | length 26.9
  F.Cu w0.15: U3.13 43.296,-15.61 v1(43.34,-15.61)
  B.Cu w0.15: v1(43.34,-15.61) 43.34,-15.59 42.925,-15.175 41.485,-15.175 36.74,-19.92 36.74,-21.551 39.619,-24.43 43.756,-24.43 44.711,-23.475 50.1,-23.475 50.375,-23.75 U5.3@50.375,-24.062
A11: U3.14 U5.6 | length 25.3
  F.Cu w0.15: v1(41.81,-15.7) 42.24,-15.7 U3.14
  B.Cu w0.15: v1(41.81,-15.7) 41.35,-15.7 36.99,-20.06 36.99,-20.58 40.34,-23.93 43.549,-23.93 44.604,-22.875 51.05,-22.875 51.875,-23.7 U5.6@51.875,-24.062
A12: U3.15 U4.9 | length 15.5
  F.Cu w0.15: U3.15 v1(43.458,-18.102)
  In3.Cu w0.15: v1(43.458,-18.102) 44.926,-19.57 54.445,-19.57 v1(54.475,-19.6)
  B.Cu w0.15: v1(54.475,-19.6) U4.9@55.213,-19.6
A13: U3.16 U5.9 | length 18.7
  F.Cu w0.15: U3.16 40.721,-15.93 40.721,-15.569 41.105,-15.185 44.775,-15.185 46.44,-16.85 48.658,-16.85 53.4,-21.592 v1(53.4,-23.4)
  B.Cu w0.15: U5.9@53.375,-24.062 53.4,-24.038 v1(53.4,-23.4)
A14: U3.17 U4.2 | length 22.2
  F.Cu w0.15: U3.17 40.806,-16.466 v1(41.57,-17.23)
  In3.Cu w0.15: v1(41.57,-17.23) 39.33,-19.47 39.33,-20.3 41.95,-22.92 54.32,-22.92 v1(54.5,-23.1)
  B.Cu w0.15: v1(54.5,-23.1) U4.2@55.213,-23.1
A15: U3.18 U4.8 | length 16.5
  F.Cu w0.15: U3.18 41.447,-17.788 42.463,-17.788 v1(43.575,-18.9)
  In3.Cu w0.15: v1(43.575,-18.9) 44.525,-19.85 47.8,-19.85 48.47,-20.52 53.55,-20.52 v1(53.95,-20.12)
  B.Cu w0.15: v1(53.95,-20.12) 53.97,-20.1 U4.8@55.213,-20.1
A16: U3.27 U4.7 | length 20.2
  F.Cu w0.15: U3.27 37.874,-19.294 v1(38.89,-20.31)
  B.Cu w0.15: v1(38.89,-20.31) 41.99,-23.41 43.362,-23.41 44.552,-22.22 49.009,-22.22 49.539,-21.69 51.635,-21.69 52.725,-20.6 U4.7@55.213,-20.6
A17: U3.28 U4.3 | length 20.8
  F.Cu w0.15: U3.28 37.579,-19.619 39.06,-21.1 39.67,-21.1 40.405,-21.835 40.405,-22.425 v1(40.4,-22.43)
  B.Cu w0.15: v1(40.4,-22.43) 41.65,-23.68 43.446,-23.68 44.501,-22.625 49.175,-22.625 49.86,-21.94 52.339,-21.94 52.424,-21.855 54.03,-21.855 54.775,-22.6 U4.3@55.213,-22.6
D0: U3.34 U10.21 | length 4.5
  F.Cu w0.15: U10.21 35.32,-23.67 37.499,-23.67 U3.34
D1: U3.35 U10.20 | length 4.9
  F.Cu w0.15: U10.20 35.33,-24.18 37.554,-24.18 U3.35
D2: U3.36 U10.19 | length 5.3
  F.Cu w0.15: U10.19 35.32,-24.67 37.63,-24.67 U3.36
D3: U3.37 U10.18 | length 5.7
  F.Cu w0.15: U10.18 35.32,-25.17 37.696,-25.17 U3.37
D4: U3.38 U10.17 | length 6
  F.Cu w0.15: U10.17 35.31,-25.66 37.771,-25.66 U3.38
D5: U3.39 U10.16 | length 6.4
  F.Cu w0.15: U10.16 35.33,-26.18 37.817,-26.18 U3.39
D6: U3.40 U10.15 | length 6.7
  F.Cu w0.15: U10.15 35.29,-26.64 37.923,-26.64 U3.40
D7: U3.41 U10.14 | length 7
  F.Cu w0.15: U10.14 35.16,-26.99 38.138,-26.99 U3.41
EXT_RESET: J2.1 R8.1 | length 8.1
  F.Cu w0.15: R8.1 54.105,-21.575 57.014,-21.575 57.8,-20.789 57.8,-18.625 J2.1
EXT_RESET_EN: U7.4 U8.1 | length 10.5
  F.Cu w0.15: U7.4@50.78,-16.65 50.6,-16.65 50.3,-16.95 50.3,-17.74 53.535,-20.975 57.15,-20.975 57.325,-20.8 U8.1
EXT_RESET_VALUE: U7.5 U8.2 | length 7.8
  F.Cu w0.15: U7.5@50.715,-17.285 50.715,-17.625 51.845,-18.755 56.021,-18.755 56.375,-19.109 U8.2@56.375,-20.325
GND: C1.2 C2.2 C3.2 C4.2 C5.2 C6.2 C7.2 C8.2 C9.2 C10.2 C11.2 C12.2 C13.2 C14.2 C15.2 C16.2 C17.2 C18.2 C19.2 C20.2 C21.2 C22.2 C23.2 C24.2 C25.2 D1.1 D2.1 D3.1 J1.A1 J1.A12 J1.B1 J1.B12 J1.S1 J3.16 J5.1 R6.1 R7.1 U1.2 U2.4 U3.19 U3.57 U4.1 U4.10 U4.19 U5.1 U5.10 U5.19 U7.3 U8.3 U9.1 U9.10 U9.19 U10.11 U10.12 U10.13 U10.22 | length 39
  F.Cu w0.15: U10.11 v1(32.16,-27.41) 32.2,-27.45 U10.12 33.36,-27.45 v1(33.4,-27.41) 33.44,-27.45 U10.13 ; C3.2 v1(33.77,-20.78) ; C2.2 33.52,-16.02 v1(33.71,-15.83) ; U10.22 v1(35.89,-23) 36.04,-23.15 C23.2 ; v1(35.813,-17.681) 36.03,-17.898 C6.2 ; v1(36.33,-17.43) 36.87,-17.43 C13.2 ; v1(39.55,-16.05) 39.55,-16.457 U3.19 ; C11.2@39.931,-26.05 40.025,-26.144 v1(40.025,-26.575) 40.446,-26.575 C9.2@40.581,-26.71 ; v1(41.73,-27.132) 41.908,-27.31 C10.2 ; v1(43.14,-27.11) 43.36,-26.89 C8.2 ; C15.2@44.69,-25.01 44.69,-25.25 v1(44.96,-25.52) ; v1(45.42,-25.82) 45.42,-25.65 C14.2@45.62,-25.45 ; v1(46.27,-24.28) 46.499,-24.051 C7.2@46.499,-23.81 ; U2.4 49.275,-24.371 v1(49.358,-24.288) ; v1(49.39,-15.78) 49.625,-16.015 U7.3@50.715,-16.015 ; C5.2 51.67,-22.22 v1(51.845,-22.395) ; C21.2 53.67,-15.19 v1(53.85,-15.01) ; U8.3 55.425,-19.525 v1(55.77,-19.18) ; v1(57.025,-25.45) 57.225,-25.65 D1.1 ; v1(58.14,-23.41) 58.7,-22.85 C22.2 ; D2.1@64.908,-27.519 65.495,-27.519 v1(65.695,-27.319) ; D3.1@64.908,-15.519 65.395,-15.519 v1(65.595,-15.719) ; v1(66.405,-24.759) 66.635,-24.529 J1.A1 ; v1(66.495,-18.379) 66.635,-18.519 J1.A12 ; J1.B12 68.185,-24.299 v1(68.605,-24.719) ; J1.B1 68.155,-18.519 v1(68.285,-18.389)
  F.Cu w0.3: C25.2 29.62,-22.59 C18.2 29.98,-23.38 v1(30.12,-23.52)
  F.Cu w0.6: v1(60.15,-19.75) 60.145,-19.745 U1.2 U1.2@60.145,-18.819 ; U1.2@60.145,-18.819 v1(59.807,-19.157) 59.819,-19.169 v1(60.495,-19.169) U1.2@60.145,-18.819
  B.Cu w0.15: C12.2 39.759,-22.251 v1(39.98,-22.03) ; C17.2 44.304,-17.126 v1(44.8,-16.63) ; C16.2 45.916,-18.824 v1(46.21,-18.53) ; v1(46.97,-25) 47.02,-25.05 C24.2 ; v1(47.94,-18.54) 48.542,-17.938 U9.10@49.312,-17.938 ; v1(49.358,-24.288) 49.438,-24.368 U5.1@49.438,-25 ; v1(49.525,-26.175) 49.788,-26.438 U5.19@49.875,-26.438 ; U9.19@53.25,-16.5 53.45,-16.5 v1(53.65,-16.7) ; U9.1@53.687,-17.938 54.02,-18.27 v1(54.02,-18.31) ; U5.10@53.813,-25 53.813,-24.763 v1(53.95,-24.625) ; v1(54.2,-16.75) 54.295,-16.655 C20.2 ; v1(55.7,-24.15) 55.755,-24.15 C19.2 ; v1(55.7,-23.625) 55.788,-23.537 U4.1@56.15,-23.537 ; v1(55.77,-19.18) 55.788,-19.162 U4.10@56.15,-19.162 ; v1(57.4,-23.475) 57.587,-23.287 U4.19@57.587,-23.1 ; v1(64.495,-17.019) 64.895,-17.419 R7.1@64.995,-17.419 ; v1(65.24,-25.15) 65.52,-25.43 R6.1
  other v1: 62.2,-23.6 62.9,-23.6 63.6,-22.4 62.6,-21.42 63.6,-21.4 62,-21 64.195,-21 62,-20.3 62.6,-19.3 63.6,-19.3
INFO_LED1: R10.2 U7.6 | length 16.6
  F.Cu w0.15: U7.6@51.215,-17.285 51.215,-17.675 51.403,-17.862 54.512,-17.862 v1(54.7,-18.05) ; v1(62.57,-26.33) 62.89,-26.33 R10.2
  In3.Cu w0.15: v1(54.7,-18.05) 54.975,-18.325 54.975,-19.525 61.78,-26.33 v1(62.57,-26.33)
INFO_LED2: R2.2 U7.7 | length 13
  F.Cu w0.15: U7.7@51.715,-17.285 52.275,-17.285 53.31,-16.25 54.25,-16.25 55.425,-15.075 61.215,-15.075 R2.2
IO_EXPAND: U3.29 U7.2 | length 16.6
  F.Cu w0.15: v1(37.45,-20.425) 37.45,-20.632 U3.29 ; v1(47.25,-15.84) 48.729,-15.84 49.214,-15.355 50.73,-15.355 51.215,-15.84 U7.2@51.215,-16.015
  In3.Cu w0.15: v1(37.45,-20.425) 37.785,-20.425 41.145,-17.065 41.145,-17.054 42.164,-16.035 43.516,-16.035 43.711,-15.84 v1(47.25,-15.84)
Net-(C3-Pad1): C3.1 R5.2 Y1.2 | length 3.7
  F.Cu w0.15: C3.1 33.15,-19.77 R5.2
  F.Cu w0.4: Y1.2 32.74,-20.18 C3.1
Net-(D1-A): D1.2 R9.1 | length 1.7
  F.Cu w0.15: R9.1 58.155,-24.467 D1.2
Net-(D2-A): D2.2 R10.1 | length 3.2
  F.Cu w0.15: R10.1 65.344,-26.13 D2.2
Net-(D3-A): D3.2 R2.1 | length 3.3
  F.Cu w0.15: R2.1 64.046,-16.594 65.657,-16.594 D3.2
Net-(D4-A): D4.2 J1.A4 J1.A9 J1.B4 J1.B9 | length 14.1
  F.Cu w0.3: v1(65.15,-20.35) 65.825,-19.675 ; v1(65.7,-20.1) 65.7,-19.8 65.825,-19.675 ; J1.A4 J1.B9 68.655,-23.509 68.915,-23.249 68.915,-20.147 68.327,-19.559 J1.B4 J1.A9 65.941,-19.559 65.825,-19.675
  B.Cu w0.3: D4.2 64.8,-20.35 ; 64.8,-20.35 65.05,-20.1 v1(65.7,-20.1) 65.45,-20.35 v1(65.15,-20.35) 64.8,-20.35
Net-(J1-CC1): J1.A5 R6.2 | length 3.6
  F.Cu w0.15: J1.A5 67.095,-22.719 v1(67.333,-22.957)
  B.Cu w0.15: R6.2 66.45,-25.358 67.333,-24.475 v1(67.333,-22.957)
Net-(J1-CC2): J1.B5 R7.2 | length 4.8
  F.Cu w0.15: v1(67.395,-20.719) 67.785,-20.719 J1.B5
  B.Cu w0.15: R7.2@65.955,-17.419 65.955,-18.44 66.319,-18.804 66.354,-18.804 67.395,-19.844 v1(67.395,-20.719)
Net-(R8-Pad2): R8.2 U8.4 | length 1.4
  F.Cu w0.15: R8.2 55.233,-22.22 U8.4
Net-(U3-USB_DM): R4.2 U3.46 | length 4.6
  F.Cu w0.15: U3.46 43.845,-24.146 43.845,-25.495 R4.2@45.62,-27.27
Net-(U3-USB_DP): R3.2 U3.47 | length 4.1
  F.Cu w0.15: U3.47 44.11,-23.845 44.11,-25.28 45.18,-26.35 R3.2@45.61,-26.35
PIN_5V: D5.2 J4.1 | length 10.7
  B.Cu w0.3: D5.2 61,-23.107 64.712,-26.819 66.245,-26.819 J4.1
PIN_A0: J3.12 U9.11 | length 10.5
  B.Cu w0.15: J3.12 41.489,-13.879 42.535,-14.925 43.751,-14.925 44.229,-15.404 47.779,-15.404 49.312,-16.937 U9.11@49.312,-17.437
PIN_A1: J3.11 U9.12 | length 7.7
  B.Cu w0.15: J3.11 44.42,-15.154 47.882,-15.154 48.934,-16.205 49.455,-16.205 U9.12@49.75,-16.5
PIN_A2: J3.10 U9.13 | length 5.9
  B.Cu w0.15: J3.10 46.71,-14.904 49.16,-14.904 50.25,-15.994 U9.13@50.25,-16.5
PIN_A3: J3.9 U9.14 | length 3.9
  B.Cu w0.15: J3.9 48.541,-13.879 50.75,-16.088 U9.14@50.75,-16.5
PIN_A4: J3.8 U9.15 | length 2.8
  B.Cu w0.15: J3.8 51.25,-14.364 U9.15@51.25,-16.5
PIN_A5: J3.7 U9.16 | length 3.3
  B.Cu w0.15: U9.16@51.75,-16.5 51.75,-16.088 53.305,-14.533 J3.7
PIN_A6: J3.6 U9.17 | length 4.9
  B.Cu w0.15: U9.17@52.25,-16.5 52.25,-16.088 52.888,-15.45 54.274,-15.45 J3.6
PIN_A7: J3.5 U9.18 | length 6.9
  B.Cu w0.15: U9.18@52.75,-16.5 52.75,-16.25 53.3,-15.7 56.564,-15.7 J3.5
PIN_A8: J4.6 U5.12 | length 3.7
  B.Cu w0.15: U5.12@53.375,-26.438 55.845,-28.907 J4.6
PIN_A9: J4.7 U5.13 | length 2.9
  B.Cu w0.15: U5.13@52.875,-26.438 52.875,-28.689 J4.7
PIN_A10: J4.10 U5.17 | length 6.4
  B.Cu w0.15: J4.10 46.71,-28.094 49.456,-28.094 50.875,-26.675 U5.17
PIN_A11: J4.8 U5.14 | length 3.3
  B.Cu w0.15: J4.8 52.375,-27.509 U5.14@52.375,-26.438
PIN_A12: J3.4 U4.11 | length 7.1
  B.Cu w0.15: U4.11@56.65,-19.162 56.65,-19.13 60.925,-14.855 J3.4
PIN_A13: J4.5 U5.11 | length 6.9
  B.Cu w0.15: U5.11@53.813,-25.5 56.21,-25.5 58.385,-27.675 J4.5
PIN_A14: J4.4 U4.18 | length 8.1
  B.Cu w0.15: U4.18@57.587,-22.6 57.976,-22.6 59.075,-23.699 59.075,-24.075 60.925,-25.925 J4.4
PIN_A15: J3.3 U4.12 | length 8.7
  B.Cu w0.15: U4.12@57.587,-19.6 57.587,-18.802 62.511,-13.879 J3.3
PIN_A16: J3.2 U4.13 | length 11
  B.Cu w0.15: U4.13@57.587,-20.1 57.925,-20.1 63.121,-14.904 64.98,-14.904 J3.2
PIN_A17: J4.3 U4.17 | length 9.7
  B.Cu w0.15: U4.17@57.587,-22.1 58,-22.1 59.475,-23.575 59.475,-23.876 63.465,-27.866 J4.3
PIN_D0: J3.13 U10.3 | length 20.2
  F.Cu w0.15: v1(29.819,-24.017) 30.313,-24.017 31.33,-23 U10.3
  B.Cu w0.15: v1(29.819,-24.017) 29.34,-23.538 29.34,-15.96 29.85,-15.45 33.41,-15.45 33.89,-14.97 36.974,-14.97 J3.13
PIN_D1: J3.14 U10.4 | length 18.8
  F.Cu w0.15: v1(29.58,-24.54) 30.15,-24.54 30.69,-24 30.905,-24 31.405,-23.5 U10.4
  B.Cu w0.15: v1(29.58,-24.54) 29.07,-24.03 29.07,-15.79 29.66,-15.2 33.23,-15.2 34.551,-13.879 J3.14
PIN_D2: J3.15 U10.5 | length 17.4
  F.Cu w0.15: v1(29.605,-25.185) 29.875,-25.185 30.81,-24.25 31.18,-24.25 31.43,-24 U10.5
  B.Cu w0.15: v1(29.605,-25.185) 28.82,-24.4 28.82,-15.65 29.53,-14.94 31.924,-14.94 J3.15
PIN_D3: J4.16 U10.6 | length 6.8
  F.Cu w0.15: v1(29.656,-25.758) 30.914,-24.5 U10.6
  B.Cu w0.15: v1(29.656,-25.758) 29.03,-26.384 29.03,-27.704 J4.16
PIN_D4: J4.15 U10.7 | length 8.3
  F.Cu w0.15: v1(29.71,-26.33) 31.04,-25 U10.7
  B.Cu w0.15: v1(29.71,-26.33) 29.31,-26.73 29.31,-27.55 29.854,-28.094 30.87,-28.094 31.68,-28.904 31.68,-28.92 31.879,-29.119 J4.15
PIN_D5: J4.14 U10.8 | length 9.7
  F.Cu w0.15: v1(29.75,-26.92) 31.17,-25.5 U10.8
  B.Cu w0.15: v1(29.75,-26.92) 29.75,-27.57 30.024,-27.844 30.973,-27.844 31.223,-28.094 33.634,-28.094 34.659,-29.119 J4.14
PIN_D6: J4.13 U10.9 | length 10.5
  F.Cu w0.15: v1(30.39,-27.01) 31.4,-26 U10.9
  B.Cu w0.15: v1(30.39,-27.01) 30.39,-27.32 30.664,-27.594 31.077,-27.594 31.327,-27.844 36.79,-27.844 J4.13
PIN_D7: J4.12 U10.10 | length 11.8
  F.Cu w0.15: v1(30.99,-27.14) 30.99,-26.915 31.405,-26.5 U10.10
  B.Cu w0.15: v1(30.99,-27.14) 31.21,-26.92 38.406,-26.92 J4.12
QSPI_SCLK: U2.6 U3.52 | length 10.2
  F.Cu w0.15: U3.52 45.127,-21.893 45.706,-22.471 46.221,-22.471 47.175,-23.425 47.175,-24.187 48.038,-25.05 51.459,-25.05 52.025,-24.484 52.025,-24.096 51.8,-23.871 U2.6
QSPI_SD0: U2.5 U3.53 | length 8
  F.Cu w0.15: U3.53 45.88,-22.221 46.325,-22.221 47.425,-23.321 47.425,-24.084 48.121,-24.78 50.941,-24.78 U2.5
QSPI_SD1: U2.2 U3.55 | length 3.6
  F.Cu w0.15: U3.55 45.855,-21.044 48.182,-23.371 U2.2
QSPI_SD2: U2.3 U3.54 | length 4.2
  F.Cu w0.15: U3.54 46.196,-21.971 46.429,-21.971 47.725,-23.268 47.725,-23.521 48.075,-23.871 U2.3
QSPI_SD3: U2.7 U3.51 | length 11.4
  F.Cu w0.15: U3.51 45.249,-22.721 46.118,-22.721 46.925,-23.528 46.925,-24.291 47.954,-25.32 51.542,-25.32 52.275,-24.587 52.275,-23.971 51.675,-23.371 U2.7
QSPI_SS: R1.1 U2.1 U3.56 | length 3.6
  F.Cu w0.15: U3.56 47.045,-20.761 R1.1 48.205,-22.576 U2.1
SWCLK: J5.3 U3.24 | length 7.2
  F.Cu w0.15: v1(35.28,-18.8) 36.662,-18.8 37.269,-18.193 38.458,-18.193 U3.24
  B.Cu w0.15: v1(35.28,-18.8) 35.28,-17.25 J5.3
SWD: J5.4 U3.25 | length 7.7
  F.Cu w0.15: v1(34.87,-19.25) 36.565,-19.25 37.339,-18.476 38.175,-18.476 U3.25
  B.Cu w0.15: v1(34.87,-19.25) 34.813,-19.193 34.813,-16.717 J5.4
unconnected-(J1-SBU1-PadA8): J1.A8
unconnected-(J1-SBU2-PadB8): J1.B8
unconnected-(J3-Pin_1-Pad1): J3.1
unconnected-(J4-Pin_2-Pad2): J4.2
unconnected-(U1-NC-Pad4): U1.4
unconnected-(U3-RUN-Pad26): U3.26
unconnected-(U4-A2-Pad4): U4.4
unconnected-(U4-A3-Pad5): U4.5
unconnected-(U4-A4-Pad6): U4.6
unconnected-(U4-B2-Pad16): U4.16
unconnected-(U4-B3-Pad15): U4.15
unconnected-(U4-B4-Pad14): U4.14
unconnected-(U5-A3-Pad5): U5.5
unconnected-(U5-B3-Pad15): U5.15
unconnected-(U7-Q4-Pad8): U7.8
USB_D+: J1.A6 J1.B6 R3.1 | length 24.4
  F.Cu w0.15: J1.A6@66.865,-21.929 J1.A6 66.971,-21.929 67.761,-21.139 J1.B6
  F.Cu w0.155: R3.1 46.696,-26.636 60.993,-26.636 65.129,-22.5 65.62,-22.5 66.191,-21.929 J1.A6
USB_D-: J1.A7 J1.B7 R4.1 | length 26.7
  F.Cu w0.15: v1(65.99,-21.49) 66.341,-21.139 J1.A7 ; v1(67.38,-22.35) 67.801,-21.929 J1.B7
  F.Cu w0.155: R4.1 46.696,-26.994 61.141,-26.994 64.944,-23.191 65.369,-23.191 65.627,-22.933 65.635,-22.925 v1(65.7,-22.925)
  B.Cu w0.15: v1(65.99,-21.49) 66.95,-21.49 67.38,-21.92 v1(67.38,-22.35)
  B.Cu w0.155: v1(65.7,-22.925) 66.275,-22.35 v1(67.38,-22.35)
XIN: C2.1 U3.20 Y1.1 | length 9.7
  F.Cu w0.15: C2.1 33.34,-16.75 39.278,-16.75 U3.20
  F.Cu w0.4: Y1.1 32.61,-16.48 C2.1
XOUT: R5.1 U3.21 | length 7.2
  F.Cu w0.15: R5.1 33.15,-17.86 34.01,-17 38.962,-17 U3.21
{\B\U\F\_\O\E\}\: U3.30 U10.2 | length 8.4
  F.Cu w0.15: v1(31.1,-22.54) 31.71,-22.54 U10.2 ; v1(35.745,-21.86) 36.904,-21.86 37.72,-21.044 U3.30
  B.Cu w0.15: v1(31.1,-22.54) 31.48,-22.92 34.746,-22.92 35.664,-22.002 35.664,-21.941 v1(35.745,-21.86)
{\C\E\}\: U3.32 U5.2 | length 15.3
  F.Cu w0.15: v1(37.43,-22.85) 38.175,-22.105 38.175,-21.862 U3.32
  B.Cu w0.15: v1(37.43,-22.85) 39.26,-24.68 43.86,-24.68 44.719,-23.821 49.634,-23.821 U5.2@49.875,-24.062
{\O\E\}\: U3.31 U5.4 | length 16
  F.Cu w0.15: v1(37.631,-21.841) U3.31
  B.Cu w0.15: v1(37.631,-21.841) 37.631,-22.051 39.76,-24.18 43.653,-24.18 44.608,-23.225 50.45,-23.225 50.875,-23.65 U5.4@50.875,-24.062
{\P\I\N\_\C\E\}\: J4.11 R11.1 U5.18 | length 10.6
  F.Cu w0.15: J4.11 44.085,-28.179 R11.1
  B.Cu w0.15: J4.11 44.42,-27.844 49.306,-27.844 50.375,-26.775 U5.18
{\P\I\N\_\O\E\}\: J4.9 U5.16 | length 4.4
  B.Cu w0.15: J4.9 48.96,-29.119 51.375,-26.704 U5.16
{\U\S\B\_\B\O\O\T\}\: J5.2 R1.2 | length 17.9
  F.Cu w0.15: J5.2 37.6,-15.208 37.873,-14.935 45.645,-14.935 v1(47.13,-16.42) ; v1(48.515,-19.115) 49.18,-19.78 49.18,-21.586 R1.2
  B.Cu w0.15: v1(47.13,-16.42) 47.13,-18.4 47.845,-19.115 v1(48.515,-19.115)
pads on no net: C5.Un1 C5.Un2 C6.Un1 C6.Un2 C7.Un1 C7.Un2 C9.Un1 C9.Un2 C11.Un1 C11.Un2 C12.Un1 C12.Un2 C13.Un1 C13.Un2 C14.Un1 C14.Un2 C15.Un1 C15.Un2 C16.Un1 C16.Un2 C17.Un1 C17.Un2 C18.Un1 C18.Un2 C19.Un1 C19.Un2 C20.Un1 C20.Un2 C21.Un1 C21.Un2 C22.Un1 C22.Un2 C23.Un1 C23.Un2 C24.Un1 C24.Un2 J1.Un1 J1.Un2 R1.Un1 R1.Un2 R2.Un1 R2.Un2 R3.Un1 R3.Un2 R4.Un1 R4.Un2 R5.Un1 R5.Un2 R6.Un1 R6.Un2 R7.Un1 R7.Un2 R8.Un1 R8.Un2 R9.Un1 R9.Un2 R10.Un1 R10.Un2 R11.Un1 R11.Un2 U2.9 U2.Un1 U3.Un1 U3.Un2 U3.Un3 U3.Un4 U4.21 U5.21 U9.21 U10.25

## Polygon pours and split planes (outlines as drawn)
+3V3 on F.Cu "F.Cu-+3V3" (solid, remove dead copper, pour order 3): 61.525,-19.319 61.545,-24.369 59.295,-24.369 59.295,-21.369 59.695,-21.369 59.7,-20.11 60.4,-20.1 60.61,-19.63 60.895,-19.319 60.875,-19.319
GND on F.Cu "F.Cu-GND" (solid, remove dead copper, pour order 2): 63.945,-18.969 61.645,-18.969 61.645,-24.369 63.245,-24.369 63.245,-23.519 64.695,-22.019 64.695,-20.569 63.945,-19.719
GND on In1.Cu "In1.Cu-GND" (solid, remove dead copper, pour order 4): 24.7,-38.351 24.7,-6.601 75.5,-6.601 75.5,-38.351
GND on In4.Cu "In4.Cu-GND" (solid, remove dead copper, pour order 5): 24.7,-38.351 24.7,-6.601 75.5,-6.601 75.5,-38.351
+3V3 on In2.Cu "In2.Cu-+3V3" (solid, remove dead copper, pour order 1): 73.655,-9.612 73.435,-35.162 25.275,-34.782 25.355,-9.232 73.655,-9.632 73.665,-9.622 73.655,-9.642

## Keep-outs
Edge.Cuts:
  lines w0: 70.645,-29.829 cw(c70.145,-29.829) 70.145,-30.329 28.945,-30.329 cw(c28.945,-29.829) 28.445,-29.829 28.445,-13.029 cw(c28.945,-13.029) 28.945,-12.529 68.913,-12.53 cw(c68.913,-13.03) 69.266,-12.676 70.494,-13.904 cw(c70.14,-14.257) 70.64,-14.257 70.645,-29.829
  lines w0.254: 70.645,-29.829 cw(c70.145,-29.829) 70.145,-30.329 28.945,-30.329 cw(c28.945,-29.829) 28.445,-29.829 28.445,-13.029 cw(c28.945,-13.029) 28.945,-12.529 68.913,-12.53 cw(c68.913,-13.03) 69.266,-12.676 70.494,-13.904 cw(c70.14,-14.257) 70.64,-14.257 70.645,-29.829

## Silkscreen, mask and mechanical layers (free items; w line width, h text height)
F.SilkS:
  circle w0.254: c70.71,-21.5 r2.052
  region: 71.112,-19.477 71.499,-19.595 71.856,-19.785 72.168,-20.042 72.425,-20.354 72.615,-20.711 72.733,-21.098 72.763,-21.4 72.772,-21.5 72.733,-21.902 72.615,-22.289 72.425,-22.646 72.168,-22.958 71.856,-23.215 71.499,-23.405 71.112,-23.523 70.81,-23.553 70.71,-23.562 70.308,-23.523 69.921,-23.405 69.564,-23.215 69.252,-22.958 68.995,-22.646 68.805,-22.289 68.687,-21.902 68.657,-21.6 68.648,-21.5 68.687,-21.098 68.805,-20.711 68.995,-20.354 69.252,-20.042 69.564,-19.785 69.921,-19.595 70.308,-19.477 70.61,-19.447 70.71,-19.438
  region: 71.49,-15.64 67.1,-15.64 67.1,-11.7 71.49,-11.7
  lines w0.254: 44.64,-23.57 46.72,-21.48 ; 67.1,-15.64 71.49,-15.64 71.49,-11.7 67.1,-11.7 67.1,-15.64
  text "SWD" at 34.84,-15.64 h0.4
  text "USB" at 36.84,-15.64 h0.4
  text "RESET" at 54.26,-16.5 h0.8
  text "LINK" at 61.05,-16.9 h0.8
  text "CLK" at 35.89,-17.38 h0.4
  text "3V3" at 33.93,-17.39 h0.4
  text "GND" at 37.87,-17.4 h0.4
  text "." at 46.727,-18.69 h3 r270
  text "v1.7" at 54.51,-25.79 h0.7
  text "PWR" at 59.79,-25.84 h0.8
  text "PicoROM" at 46.565,-26.851 h1.5
  text "READ" at 60.7,-28.4 h0.8
B.SilkS:
  text "@wickerwaka" at 47.05,-27.633 h1.8